# EAGLE board 10w_CREE_LED_driver_auto (EAGLE 6.2)

Size 49 x 49 mm. Coordinates in mm from the lower left corner, seen from the top.
Outline: circle at 24.5,24.5 radius 24.5
Copper layers (1*16): Top 0.035mm / dielectric 1.5mm / Bottom 0.035mm
Design rules: minimum track width 8mil, minimum drill 20mil, track to track 8mil, track to pad 8mil, pad to pad 8mil, via to via 8mil, smd to smd 8mil, copper to edge 10mil, drill to drill 8mil, minimum pad ring 12mil, minimum via ring 10mil, stop-mask expansion 4mil, vias tented up to drill 25mil, thermal gap 10mil
Net classes: 0 default: width 0.406 mm

## Footprints (pad centres in the part's own frame; a part is rotated, then mirrored left to right if it is on the bottom)
175TMP-0810 = smd 3 x 2.5: + 3.5,0; - -3.5,0
DO214AC = smd 1.8 x 1.7: A 2.05,0; C -2.05,0
TDK6045 = smd 6.6 x 2.55: 1 0,2.05; 2 0,-1.95
R0805 = smd 1.1 x 1.4: 1 -1,0; 2 1,0
R0603 = smd 1 x 1.1: 1 -0.85,0; 2 0.85,0
CREE_XLAMP_XML = smd 0.7 x 1: 1 2.15,2; 2 2.15,0.6; 3 2.15,-0.6; 4 2.15,-2; 5 -2.15,-2; 6 -2.15,-0.6; 7 -2.15,0.6; 8 -2.15,2 | smd 2.9 x 5: P$1 0,0
SOT89-5 = smd 0.8 x 1.2: 1 -1.5,-2.362; 2 0.001,-2.362; 3 1.5,-2.362; 4 1.5,1.016; 5 -1.5,0.991 | smd 1.93 x 2.5: THEM 0,0.488

## Placement (x,y rotation side)
C1  150uF  [175TMP-0810]  11.3,36.9 180 top
C2  150uF  [175TMP-0810]  40.1,11.5 0 top
D1  SCHOTTKY  [DO214AC]  36.2,25.3 270 top
D2  SCHOTTKY  [DO214AC]  29.1,45.9 180 top
D3  SCHOTTKY  [DO214AC]  13.7,23.1 90 top
D5  SCHOTTKY  [DO214AC]  24.6,14.5 180 top
L1  47uH  [TDK6045]  41.9,22.3 180 top
L2  47uH  [TDK6045]  20.1,8.2 90 top
L3  47uH  [TDK6045]  21.8,39.9 180 top
L4  47uH  [TDK6045]  6.8,26.9 0 top
R1  0.14  [R0805]  38.5,28.2 90 top
R2  10K  [R0603]  44.7,33.4 270 top
R3  0.14  [R0805]  27.5,11.7 0 top
R4  10K  [R0603]  28.3,3.2 0 top
R5  0.14  [R0805]  34.3,37.7 180 top
R6  10K  [R0603]  27.3,37.2 90 top
R7  0.14  [R0805]  10.8,19.5 270 top
R8  10K  [R0603]  6.1,14.2 0 top
U$1  CREE_XLAMP_RGBW  [CREE_XLAMP_XML]  24.5,24.5 0 top
U$2  ZLED7000-LEDDRIVER  [SOT89-5]  42,28.4 90 top
U$3  ZLED7000-LEDDRIVER  [SOT89-5]  29.9,41.6 270 top
U$4  ZLED7000-LEDDRIVER  [SOT89-5]  6.7,19.7 270 top
U$6  ZLED7000-LEDDRIVER  [SOT89-5]  28,8.4 0 top

## Library data of the parts
C1 C2 R1-R8 U$2-U$4 U$6 = adafruit
D1-D3 D5 = diode
L1-L4 = rcl
U$1 = led

## Nets
B+: R7.2 U$1.3 U$4.4
B-: L4.1 U$1.6
G+: R1.2 U$1.2 U$2.4
G-: L1.1 U$1.7
GND: U$2.2 U$3.2 U$4.2 U$6.2
N$1: R2.2 U$2.3
N$2: R2.1
N$3: C1.+
N$5: D1.A L1.2 U$2.1
N$7: D5.A L2.2 U$6.1
N$8: R4.2 U$6.3
N$9: R4.1
N$11: D2.A L3.2 U$3.1
N$12: R6.2 U$3.3
N$13: R6.1
N$15: D3.A L4.2 U$4.1
N$16: R8.2 U$4.3
N$17: R8.1
R+: R5.2 U$1.1 U$3.4
R-: L3.1 U$1.8
VCC: D1.C D2.C D3.C D5.C R1.1 R3.1 R5.1 R7.1 U$2.5 U$3.5 U$4.5 U$6.5
W+: R3.2 U$1.4 U$6.4
W-: L2.1 U$1.5

## Tracks (layer width: path | path; a pad name or v marks a point on that pad's centre or on a via)
B+  (2 unrouted)
B-  (1 unrouted)
G+  (2 unrouted)
G-  (1 unrouted)
GND  (3 unrouted)
N$1  (1 unrouted)
N$5  (2 unrouted)
N$7  (2 unrouted)
N$8  (1 unrouted)
N$11  (2 unrouted)
N$12  (1 unrouted)
N$15  (2 unrouted)
N$16  (1 unrouted)
R+  (2 unrouted)
R-  (1 unrouted)
VCC  (11 unrouted)
W+  (2 unrouted)
W-  (1 unrouted)